# Altium PCB PCB1.PcbDoc
Units mil, origin at the board's own origin, x right, y up, seen from the top; angles counter-clockwise.
Board outline 3460 x 2710 mil, 2 copper layers (Top Layer, Bottom Layer); 8 components, 6 nets, 22 pads, 0 vias.
Unrouted connection lines stored in the file: 1.
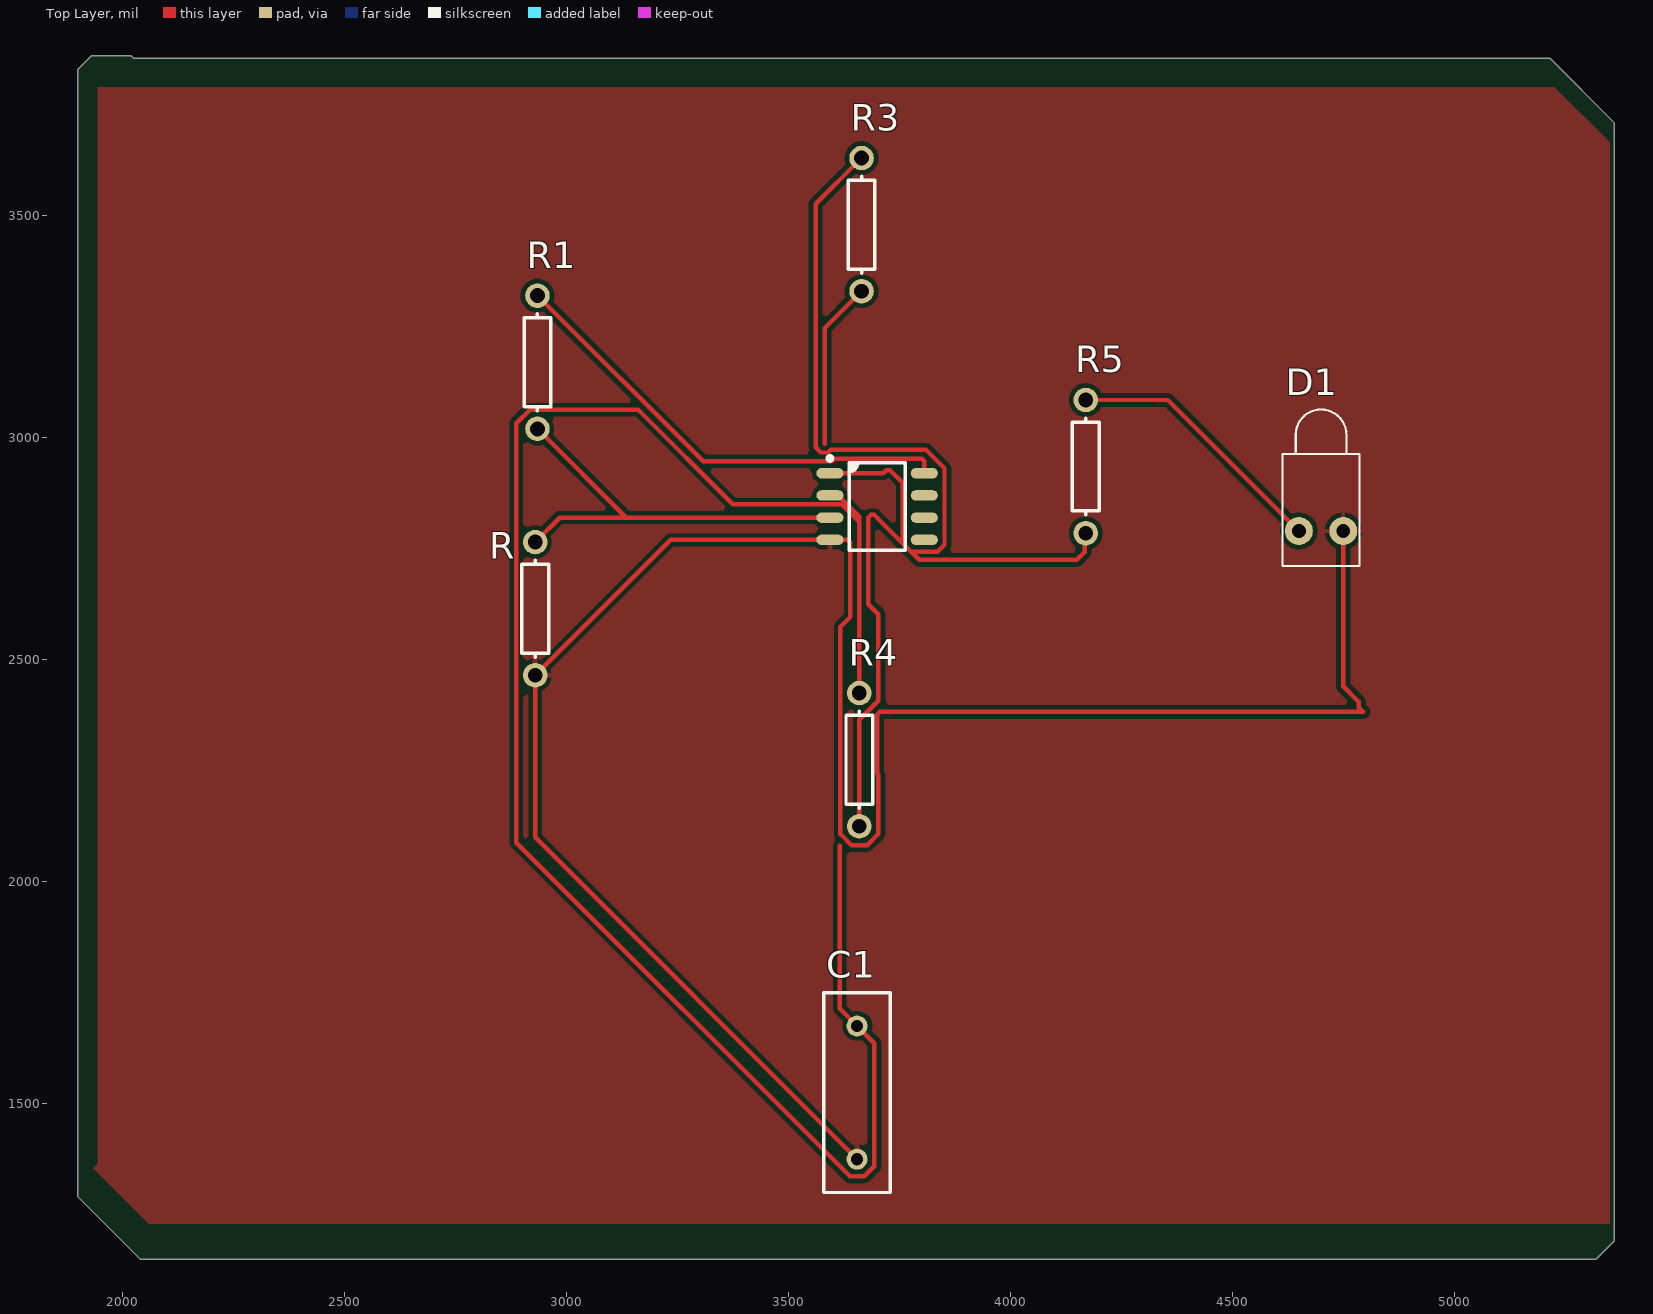
[diagram p0: Top Layer view]
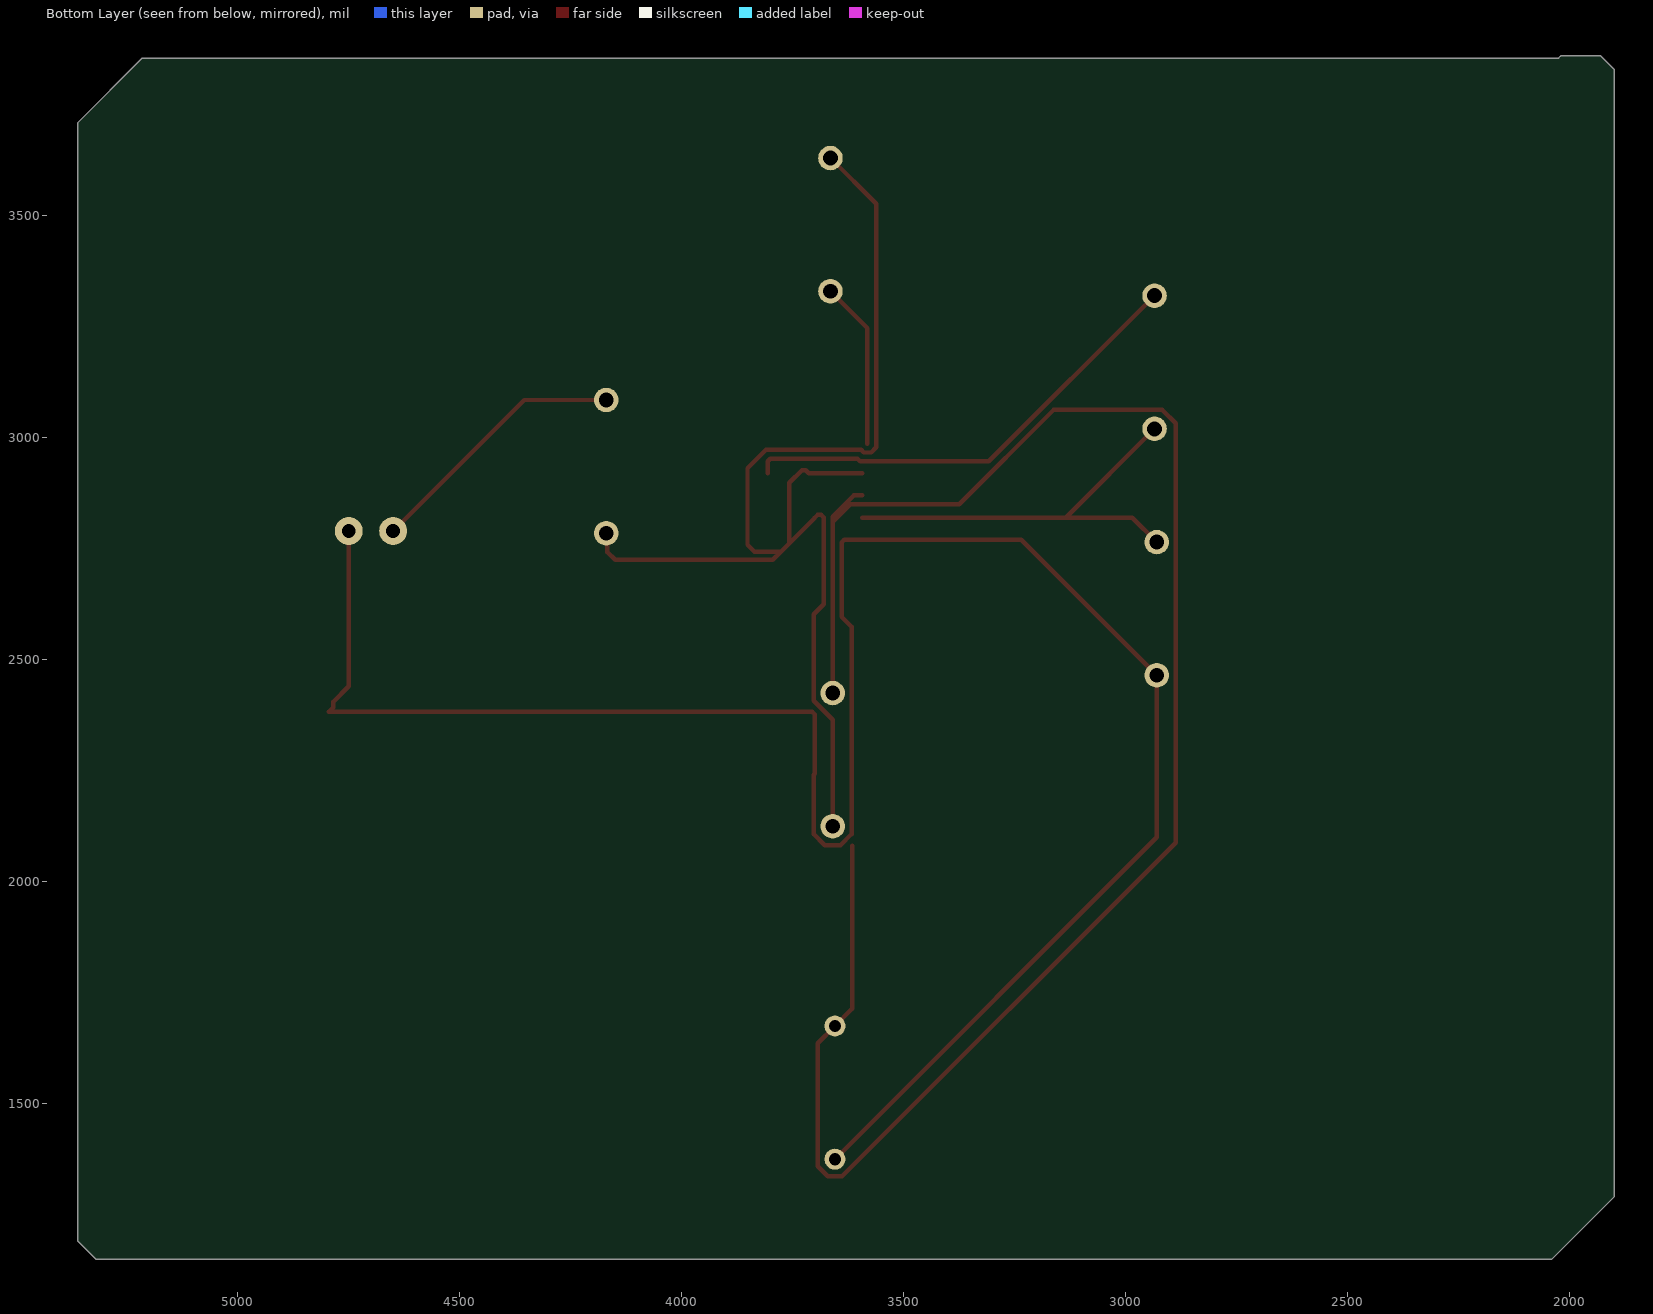
[diagram p1: Bottom Layer view, seen from below]

## Layer stack, top to bottom
Top Solder: solder mask 0.4, Solder Resist, Dk 3.5
Top Layer: signal copper 1.4
Dielectric 1: dielectric 12.6, FR-4, Dk 4.8
Bottom Layer: signal copper 1.4
Bottom Solder: solder mask 0.4, Solder Resist, Dk 3.5

## Board outline
1900,1290 2040,1150 5320,1150 5360,1190 5360,3710 5215,3855 2025,3855 2020,3860 1930,3860 1900,3830

## Design rules (kind name [scope] priority, off if disabled: settings)
Clearance [All] p1: gap=10 ignorepadtopadclearanceinfootprint=FALSE
PolygonConnect [All] p1: connectstyle=Relief reliefconductorwidth=10 reliefentries=4 polygonreliefangle="90 Angle" airgapwidth=10
RoutingVias [All] p1: holewidth=28 width=50 viastyle="Through Hole" minholewidth=28 minwidth=50 maxholewidth=28 maxwidth=50
SolderMaskExpansion [All] p1: expansion=4 istentingtop=FALSE
SupplyNets "Schematic Supply Nets_1" [InNet('GND')] p1: voltage=0.000
SupplyNets "Schematic Supply Nets" [InNet('+5')] p2: voltage=0.000
Width [All] p1: maxlimit=10 minlimit=10 preferedwidth=10
30 further rules are at their usual default settings.

## Components (designator, comment, footprint, x,y, rotation, side; value= is the part's Value field where it differs from the comment)
C1 "Cap" RAD-0.3 3655,1525 r90 top value=10µF
D1 "LED1" LED-1 4700,2790 r90 top
R "Res1" AXIAL-0.3 2930,2615 r90 top value=10K
R1 "Res1" AXIAL-0.3 2935,3170 r90 top value=10K
R3 "Res1" AXIAL-0.3 3665,3480 r90 top value=100K
R4 "Res1" AXIAL-0.3 3660,2275 r90 top value=10K
R5 "Res1" AXIAL-0.3 4170,2935 r90 top value=330
U1 "LM2904DR" "TI SOIC-8 D" 3700,2845 r0 top

## Footprints (in the part's own frame and the unit in brackets; to place one, negate y for a bottom-side part, rotate by r counter-clockwise, add the part's x,y. Pads: shape width x height; smd on the part's side, far side on the other; paste and mask are expansions set on the pad)
AXIAL-0.3 [mm] "Axial Device, Thru-Hole; 2 Leads; 0.3 in Pin Spacing"
  round 1.4 hole 0.85: 1(-3.81,0) 2(3.81,0)
  silkscreen extent -2.77,-0.76 2.77,0.76
LED-1 [mm] "LED; 2 Leads"
  round 1.6 hole 0.8: 1(0,1.27) 2(0,-1.27)
  silkscreen extent -2,-2.2 6.95,2.2
RAD-0.3 [mm] "Radial Cap, Thru-Hole; 2 Leads; 0.3 in Pin Spacing"
  round 1.2 hole 0.7: 1(-3.81,0) 2(3.81,0)
  silkscreen extent -5.71,-1.91 5.71,1.91
"TI SOIC-8 D" [mm] "SOP, 8-Leads, Body 4.90x3.90mm, Pitch 1.27mm, IPC Medium Density"
  oval 1.55x0.6 smd: 1(-2.7,1.905) 2(-2.7,0.635) 3(-2.7,-0.635) 4(-2.7,-1.905) 5(2.7,-1.905) 6(2.7,-0.635) 7(2.7,0.635) 8(2.7,1.905)
  silkscreen extent -2.82,-2.5 1.6,2.88, body extent -3.01,-2.45 3.01,2.45, height 1.5

## Part data
C1: "Capacitor", LatestRevisionDate=17-Jul-2002, LatestRevisionNote="Re-released for DXP Platform.", PackageDescription="Radial Cap, Thru-Hole; 2 Leads; 0.3 in Pin Spacing", PackageReference=RAD-0.3, Published=8-Jun-2000, Publisher="Altium Limited"
D1: "Typical RED GaAs LED", LatestRevisionDate=08-Jul-2005, LatestRevisionNote="Mech Layer 1 removed.", PackageDescription="LED; 2 Leads", PackageReference=LED-1, Published=8-Jun-2000, Publisher="Altium Limited"
R R1 R3 R4 R5: "Resistor", LatestRevisionDate=17-Jul-2002, LatestRevisionNote="Re-released for DXP Platform.", PackageDescription="Axial Device, Thru-Hole; 2 Leads; 0.3 in Pin Spacing", PackageReference=AXIAL-0.3, Published=8-Jun-2000, Publisher="Altium Limited"
U1: "IC OPAMP GP 2 CIRCUIT 8SOIC", Current - Input Bias=20nA, Current - Output / Channel=30mA, Current - Supply=1mA, Device Package="8-SOIC (0.154\", 3.90mm Width)", Manufacturer="Texas Instruments", Operating Temperature="-40°C ~ 125°C", Supplier Device Package=8-SOIC, Supplier Part Number 1=296-14596-1-ND, Voltage - Input Offset=3mV, Voltage - Supply, Single/Dual (±)="3V ~ 26V, ±1.5V ~ 13V", Amplifier Type="General Purpose", ComponentLink1Description=Datasheet, ComponentLink1URL=http://www.ti.com/general/docs/suppproductinfo.tsp?distId=10&gotoUrl=http%3A%2F%2Fwww.ti.com%2Flit%2Fgpn%2Flm258a, ComponentLink2Description="DigiKey Link", ComponentLink2URL=http://digikey.com/product-detail/en/texas-instruments/LM2904DR/296-14596-1-ND/555533, Gain Bandwidth Product=700kHz, LastUpdated="09-01-2020 02:06:28", Lifecycle Status=Active, Minimum Order=1, Mounting Type="Surface Mount", Number of Circuits=2, Package / Case="8-SOIC (0.154\", 3.90mm Width)", Packaging=ReReel, Part Number=LM2904DR, Part Status=Active, PartId=4, Price=0.00, Series=-, Slew Rate=0.3V/µs, Supplier 1=DigiKey

## Nets (pads, with @x,y where several pads share a name; then routed paths per layer and width w, separated by ;. In a path a pad name is that pad's centre, name@x,y a point inside that pad or via, vN(x,y) a via of type N, cw(c..) or ccw(c..) an arc to the next point about the centre after c; other vN are vias at no path point)
+5: R1.2 U1.8 | length 1057.5
  Top Layer w10: R1.2 3308.19,2946.81 3598.28,2946.81 3604.14,2952.67 3800.44,2952.67 3806.3,2946.81 U1.8
GND: C1.1 D1.2 R.1 U1.4 | length 4794.8
  Top Layer w10: C1.1 2930,2100 R.1 3235,2770 U1.4 3634.14,2770 3640,2764.14 3640,2597.04 3617.44,2574.48 3617.44,2107.37 3642.37,2082.44 3677.63,2082.44 3702.56,2107.37 3702.56,2240.73 3700.05,2243.23 3700.05,2376.58 3705.91,2382.44 4795,2382.44 4785,2392.44 4785,2405 4750,2440 D1.2
NetC1_2: C1.2 R4.2 U1.2 | length 4198.4
  Top Layer w10: U1.2 3612.4,2870 3660,2822.4 3660,2810.32 ; 3615.76,2080.76 3615.76,1714.24 C1.2 3693.62,1636.38 3693.62,1359 3671,1336.38 3639,1336.38 2887.44,2087.94 2887.44,3032.63 2917.37,3062.56 3162.56,3062.56 3375.12,2850 3620.32,2850 3660,2810.32 ; R4.2 3660,2810.32
NetD1_1: D1.1 R5.2 | length 602.2
  Top Layer w10: R5.2 4355,3085 D1.1
NetR1_1: R1.1 R3.1 R.2 U1.3 | length 1347
  Top Layer w10: R.2 2985,2820 3135,2820 ; R1.1 3135,2820 ; 3581.72,2986.81 3581.72,3246.72 R3.1 ; U1.3 3135,2820
NetR3_2: R3.2 R4.1 R5.1 U1.1 | length 2882.9
  Top Layer w10: U1.1 3713.99,2920 3720.81,2926.81 3729.09,2926.81 3757.57,2898.33 3757.57,2762.11 ; R4.1 3660,2364.81 3702.56,2407.37 3702.56,2602.57 3680,2625.12 3680,2820.32 3685.86,2826.18 3694.14,2826.18 3700,2820.32 3700,2819.68 3776.49,2743.19 ; R3.2 3561.72,3526.72 3561.72,2978.53 3573.43,2966.81 3590,2966.81 3595.86,2972.67 3810.25,2972.67 3851.81,2931.11 3851.81,2758.89 3836.11,2743.19 3776.49,2743.19 ; R5.1 4167.44,2782.44 4167.44,2742.44 4150,2725 3794.68,2725 3776.49,2743.19
pads on no net: U1.5 U1.6 U1.7

## Polygon pours and split planes (outlines as drawn)
GND on Top Layer "GND_L01_P000" (solid, pour order 0): 5225,3790 5350,3665 5350,1230 2060,1230 1935,1355 1945,1365 1945,3790 2040,3790

## Silkscreen, mask and mechanical layers (free items; w line width, h text height)
Mechanical 13:
  the board outline again, w10